# EAGLE board vco_pots (EAGLE 7.6.0)
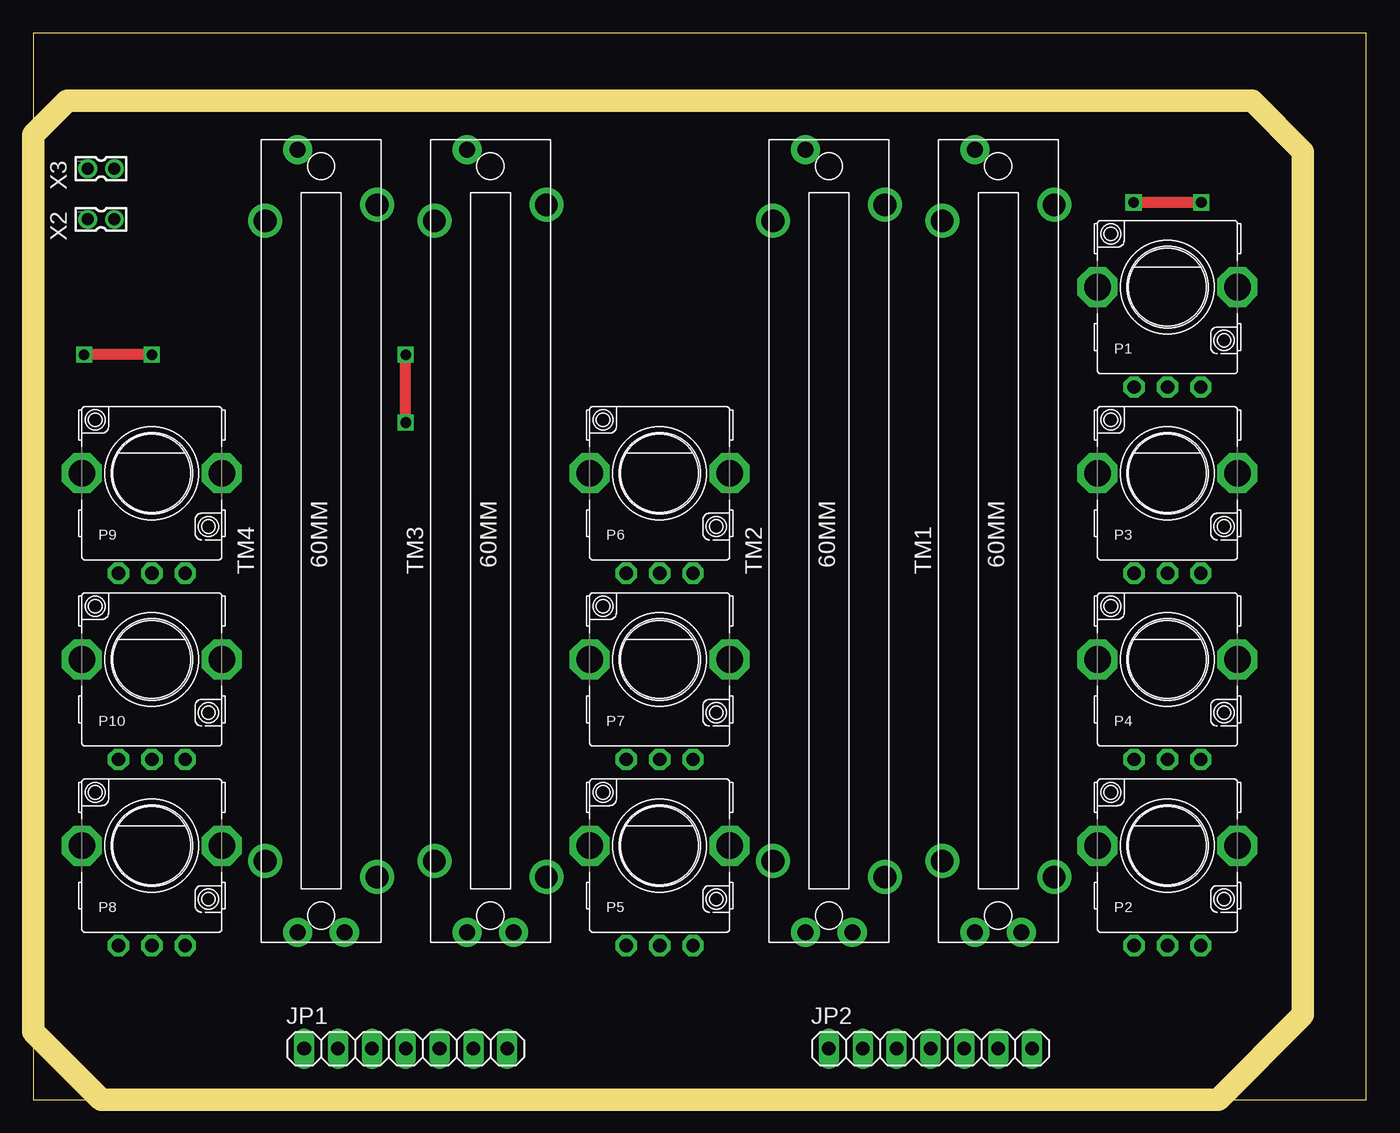
[diagram p0: board, top side]
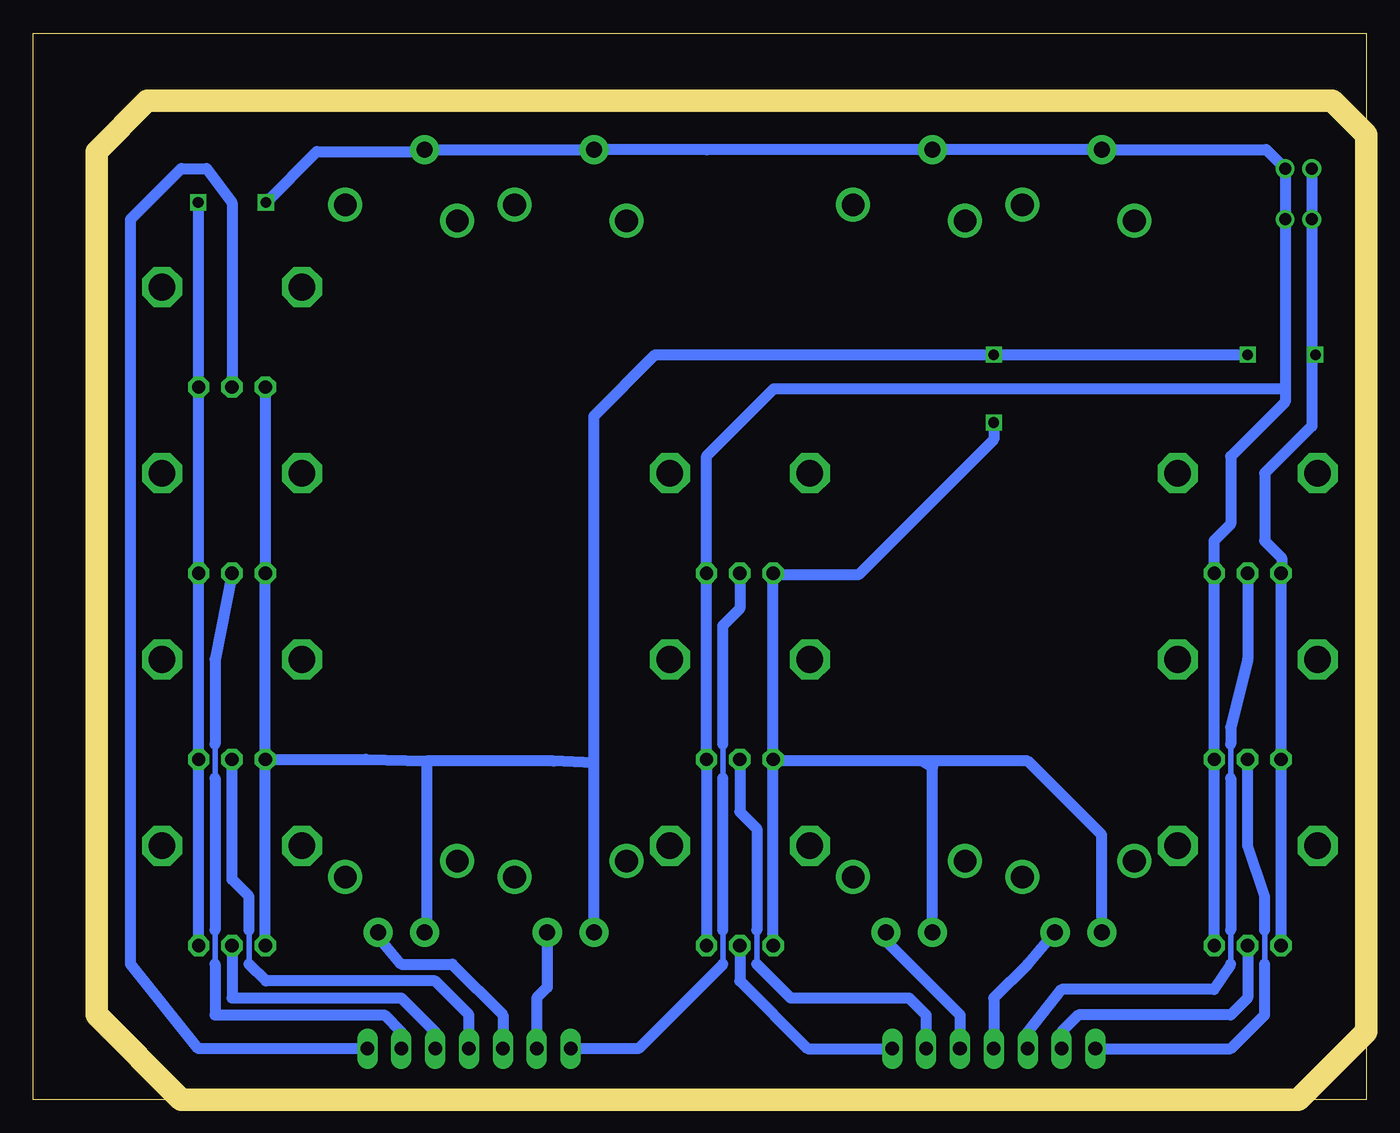
[diagram p1: board, bottom side, seen from below]

Size 100 x 80 mm. Coordinates in mm from the lower left corner, seen from the top.
Outline: 0,0 100,0 100,80 0,80 0,0
Copper layers (1*16): Top 0.035mm / dielectric 1.5mm / Bottom 0.035mm
Design rules "default *": minimum track width 16mil, minimum drill 31mil, track to track 12mil, track to pad 12mil, pad to pad 12mil, via to via 12mil, smd to smd 8mil, copper to edge 0mil, drill to drill 16mil, minimum pad ring 10mil, minimum via ring 8mil, stop-mask expansion 4mil, vias tented up to drill 0mil, thermal gap 10mil
Milling: 8 lines

## Footprints (pad centres in the part's own frame; a part is rotated, then mirrored left to right if it is on the bottom)
1X07 = drill 1.016 long: 1 -7.62,0; 2 -5.08,0; 3 -2.54,0; 4 0,0; 5 2.54,0; 6 5.08,0; 7 7.62,0
P0915N = drill 1 pad 1.6 octagon: A -2.5,-7.5; E 2.5,-7.5; S 0,-7.5 | drill 2 pad 3 octagon: GND@1 -5.25,0; GND@2 5.25,0
SLIDEPOT-60 = drill 1.2 pad 2.184: A -29.37,1.75; B 29.37,1.75; WIPER -29.37,-1.75 | drill 1.7 pad 2.54: P$1 -24.02,4.2; P$2 24.02,4.2; P$3 -25.22,-4.2; P$4 25.22,-4.2
87758-0216 = drill 0.9 pad 1.27: 1 0,-1; 2 0,1

## Placement (x,y rotation side)
JP1  [1X07]  27.94,3.81 0 top
JP2  [1X07]  67.31,3.81 0 top
P1  P0915N  [P0915N]  85.09,60.96 0 top
P2  P0915N  [P0915N]  85.09,19.05 0 top
P3  P0915N  [P0915N]  85.09,46.99 0 top
P4  P0915N  [P0915N]  85.09,33.02 0 top
P5  P0915N  [P0915N]  46.99,19.05 0 top
P6  P0915N  [P0915N]  46.99,46.99 0 top
P7  P0915N  [P0915N]  46.99,33.02 0 top
P8  P0915N  [P0915N]  8.89,19.05 0 top
P9  P0915N  [P0915N]  8.89,46.99 0 top
P10  P0915N  [P0915N]  8.89,33.02 0 top
TM1  [SLIDEPOT-60]  72.39,41.91 90 top
TM2  [SLIDEPOT-60]  59.69,41.91 90 top
TM3  [SLIDEPOT-60]  34.29,41.91 90 top
TM4  [SLIDEPOT-60]  21.59,41.91 90 top
X2  87758-0216  [87758-0216]  5.08,66.04 270 top
X3  87758-0216  [87758-0216]  5.08,69.85 270 top

## Library data of the parts
JP1 JP2 = pinhead
P1-P10 = pot-tt_electronics
TM1-TM4 = stefan-lochbrunner_EAGLE_master_custom%20libraries_potentiometers_Bourns%20PTA%20series_Bourns%20PTA%20series
X2 X3 = con-molex; MPN: 87758-0216; OC_FARNELL: unknown; OC_NEWARK: 94M1513

## Nets
+5V: P1.E P2.E P3.E P4.E P5.E P6.E P7.E P8.E P9.E P10.E TM1.B TM2.B TM3.B TM4.B X2.2 X3.2
GND: P1.A P2.A P3.A P4.A P5.A P6.A P7.A P8.A P9.A P10.A TM1.A TM2.A TM3.A TM4.A X2.1 X3.1
N$1: JP1.1 P10.S
N$2: JP2.1 P6.S
N$3: JP2.5 P2.S
N$4: JP1.6 P7.S
N$5: JP2.6 P3.S
N$6: JP1.2 P8.S
N$7: JP1.3 P9.S
N$8: JP1.7 P5.S
N$9: JP2.7 P1.S
N$10: JP2.4 P4.S
N$11: JP1.4 TM4.WIPER
N$12: JP1.5 TM3.WIPER
N$13: JP2.2 TM2.WIPER
N$14: JP2.3 TM1.WIPER

## Tracks (layer width: path | path; a pad name or v marks a point on that pad's centre or on a via)
+5V  (via drill 0.8)
  Top 0.813: v87.63,67.31 v82.55,67.31
  Bottom 0.813: 6.08,53.34 X2.2 X3.2 7.51,71.28 TM4.B TM3.B 49.53,71.28 | 6.08,53.34 6.08,52.34 10.16,48.26 10.16,43.18 11.43,41.91 11.43,39.53 P9.E P10.E P8.E | 49.53,71.28 TM2.B TM1.B 70.8,71.12 78.74,71.12 v82.55,67.31 | P2.E P4.E P3.E P1.E 87.59,67.27 v87.63,67.31 | P5.E P7.E P6.E 49.49,48.3 44.45,53.34 6.08,53.34 | 49.49,71.24 49.53,71.28
GND  (via drill 0.8)
  Top 0.813: v27.94,50.8 v27.94,55.88 | v8.89,55.88 v3.81,55.88
  Bottom 0.813: X3.1 X2.1 4.08,55.88 | 4.08,55.88 4.08,50.53 7.62,46.99 7.62,41.91 6.35,40.64 6.35,39.53 P9.A P10.A P8.A | 57.94,25.25 60.96,25.4 70.48,25.4 | 70.48,25.4 70.48,13.02 TM1.A | P5.A P7.A | P7.A P6.A 44.37,39.37 38.1,39.37 27.94,49.53 v27.94,50.8 | TM3.A 32.54,24.92 | 32.54,24.92 33.02,25.4 | 33.33,25.4 44.37,25.4 P7.A | P1.A P3.A P4.A | P4.A 75.05,25.52 70.48,25.4 | P2.A P4.A | v8.89,55.88 v27.94,55.88 53.34,55.88 57.94,51.28 57.94,25.25 | v3.81,55.88 4.08,55.88 | TM2.A 57.94,25.25 | TM4.A 19.84,19.84 25.4,25.4 33.02,25.4 | 33.02,25.4 33.33,25.4 | 33.33,25.4 32.54,24.92
N$1
  Bottom 0.406: 7.62,10.16 7.62,12.7
  Bottom 0.813: JP1.1 10.16,3.81 7.62,6.35 7.62,10.16 | P10.S 8.89,19.05 7.62,15.24 7.62,12.7
N$2
  Bottom 0.406: 48.26,10.16 48.26,12.7 | 48.26,24.13 48.26,26.67
  Bottom 0.813: P6.S 46.99,36.83 48.26,35.56 48.26,26.67 | 48.26,10.16 54.61,3.81 JP2.1 | 48.26,12.7 48.26,24.13
N$3
  Bottom 0.813: P2.S 85.09,7.62 72.39,7.62 69.85,5.08 JP2.5
N$4
  Bottom 0.406: 45.72,12.7 45.72,10.16
  Bottom 0.813: P7.S 46.99,21.59 45.72,20.32 45.72,12.7 | 45.72,10.16 43.18,7.62 34.29,7.62 33.02,6.35 JP1.6
N$5
  Bottom 0.406: 86.36,26.67 86.36,24.13 | 86.36,12.7 86.36,10.16
  Bottom 0.813: P3.S 86.36,33.02 86.36,26.67 | 86.36,10.16 86.36,6.35 73.66,6.35 72.39,5.08 JP2.6 | 86.36,24.13 86.36,12.7
N$6
  Bottom 0.813: P8.S 8.89,7.62 10.16,6.35 21.59,6.35 22.86,5.08 JP1.2
N$7
  Bottom 0.406: 10.16,26.67 10.16,24.13 | 10.16,12.7 10.16,10.16
  Bottom 0.813: P9.S 8.89,33.02 10.16,27.94 10.16,26.67 | JP1.3 25.4,5.08 22.86,8.26 11.43,8.26 10.16,10.16 | 10.16,24.13 10.16,12.7
N$8
  Bottom 0.813: P5.S 46.99,8.89 41.91,3.81 JP1.7
N$9
  Bottom 0.813: JP2.7 87.63,3.81 92.71,10.16 92.71,66.04 88.9,69.85 87,69.85 85.09,67.31 P1.S
N$10
  Bottom 0.406: 83.82,10.16 83.82,12.7
  Bottom 0.813: JP2.4 67.31,6.35 69.85,8.89 82.55,8.89 83.82,10.16 | P4.S 85.09,16.51 83.82,15.24 83.82,12.7
N$11
  Bottom 0.813: TM4.WIPER 25.4,10.16 27.94,7.62 JP1.4
N$12
  Bottom 0.813: TM3.WIPER 36.04,11.91 30.48,6.35 JP1.5
N$13
  Bottom 0.813: TM2.WIPER 61.44,8.41 62.23,7.62 JP2.2
N$14
  Bottom 0.813: TM1.WIPER 74.14,12.22 72.39,10.16 68.58,10.16 64.77,6.35 JP2.3